# EAGLE board untitled (EAGLE 7.2.0)
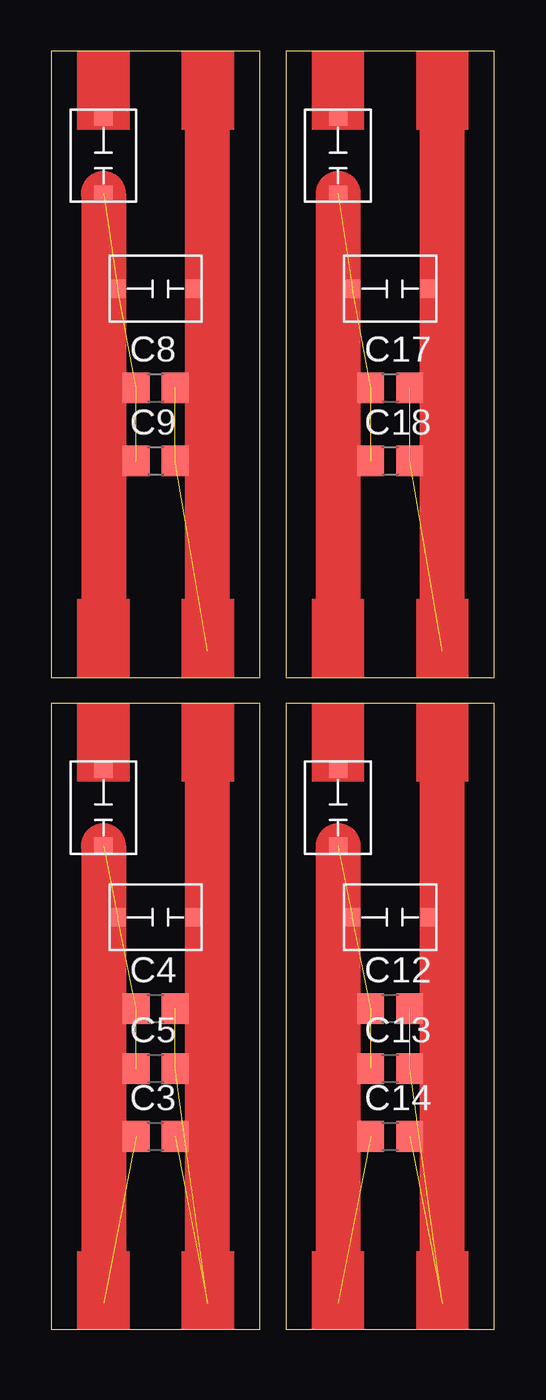
[diagram p0: board, top side]

Size 21.59 x 62.23 mm. Coordinates in mm from the lower left corner, seen from the top.
Outline: 0,0 10.16,0 10.16,30.48 0,30.48 0,0
Outline: 0,31.75 10.16,31.75 10.16,62.23 0,62.23 0,31.75
Outline: 11.43,0 21.59,0 21.59,30.48 11.43,30.48 11.43,0
Outline: 11.43,31.75 21.59,31.75 21.59,62.23 11.43,62.23 11.43,31.75
Copper layers (1*16): Top 0.035mm / dielectric 1.5mm / Bottom 0.035mm
Design rules "default": minimum track width 10mil, minimum drill 24mil, track to track 8mil, track to pad 8mil, pad to pad 8mil, via to via 8mil, smd to smd 8mil, copper to edge 40mil, drill to drill 8mil, minimum pad ring 10mil, minimum via ring 8mil, stop-mask expansion 4mil, vias tented up to drill 0mil, thermal gap 10mil

## Footprints (pad centres in the part's own frame; a part is rotated, then mirrored left to right if it is on the bottom)
SGC3S = smd 0.9 x 0.8: P$1 0,1.85; P$2 0,-1.85
C0805 = smd 1.3 x 1.5: 1 -0.95,0; 2 0.95,0

## Placement (x,y rotation side)
C1  5-20  [SGC3S]  2.54,25.4 180 top
C2  10-30  [SGC3S]  5.08,20.07 270 top
C3  100p  [C0805]  5.08,9.4 0 top
C4  100p  [C0805]  5.08,15.62 0 top
C5  50p  [C0805]  5.08,12.7 0 top
C6  5-20  [SGC3S]  2.54,57.15 180 top
C7  10-30  [SGC3S]  5.08,50.67 270 top
C8  100p  [C0805]  5.08,45.85 0 top
C9  50p  [C0805]  5.08,42.29 0 top
C10  5-20  [SGC3S]  13.97,25.4 180 top
C11  10-30  [SGC3S]  16.51,20.07 270 top
C12  100p  [C0805]  16.51,15.62 0 top
C13  50p  [C0805]  16.51,12.7 0 top
C14  100p  [C0805]  16.51,9.4 0 top
C15  5-20  [SGC3S]  13.97,57.15 180 top
C16  10-30  [SGC3S]  16.51,50.67 270 top
C17  100p  [C0805]  16.51,45.85 0 top
C18  50p  [C0805]  16.51,42.29 0 top

## Library data of the parts
C1 C2 C6 C7 C10 C11 C15 C16 = sprague
C3-C5 C8 C9 C12-C14 C17 C18 = rcl

## Nets
N$1: C1.P$1 C2.P$2 C3.1 C4.1 C5.1
N$2: C6.P$1 C7.P$2 C8.1 C9.1
N$3: C6.P$2
N$4: C8.2 C9.2
N$5: C10.P$1 C11.P$2 C12.1 C13.1 C14.1
N$6: C10.P$2
N$7: C1.P$2
N$8: C3.2 C4.2 C5.2
N$9: C12.2 C13.2 C14.2
N$10: C15.P$1 C16.P$2 C17.1 C18.1
N$11: C15.P$2
N$12: C17.2 C18.2

## Tracks (layer width: path | path; a pad name or v marks a point on that pad's centre or on a via)
N$1  (4 unrouted)
  Top 2.184: C1.P$1 2.54,1.27
N$2  (3 unrouted)
  Top 2.184: C6.P$1 2.54,33.02
N$4  (2 unrouted)
  Top 2.184: 7.62,33.02 7.62,59.69
N$5  (4 unrouted)
  Top 2.184: C10.P$1 13.97,1.27
N$8  (3 unrouted)
  Top 2.184: 7.62,1.27 7.62,27.94
N$9  (3 unrouted)
  Top 2.184: 19.05,1.27 19.05,27.94
N$10  (3 unrouted)
  Top 2.184: C15.P$1 13.97,33.02
N$12  (2 unrouted)
  Top 2.184: 19.05,33.02 19.05,59.69
(copper drawn outside any net)
  shapes: Top area x16